# Altium PCB Spatial Breakout.PcbDoc
Units mm, origin at the board's own origin, x right, y up, seen from the top; angles counter-clockwise.
Board outline 18 x 16 mm, 2 copper layers (Top Layer, Bottom Layer); 14 components, 15 nets, 89 pads, 13 vias.
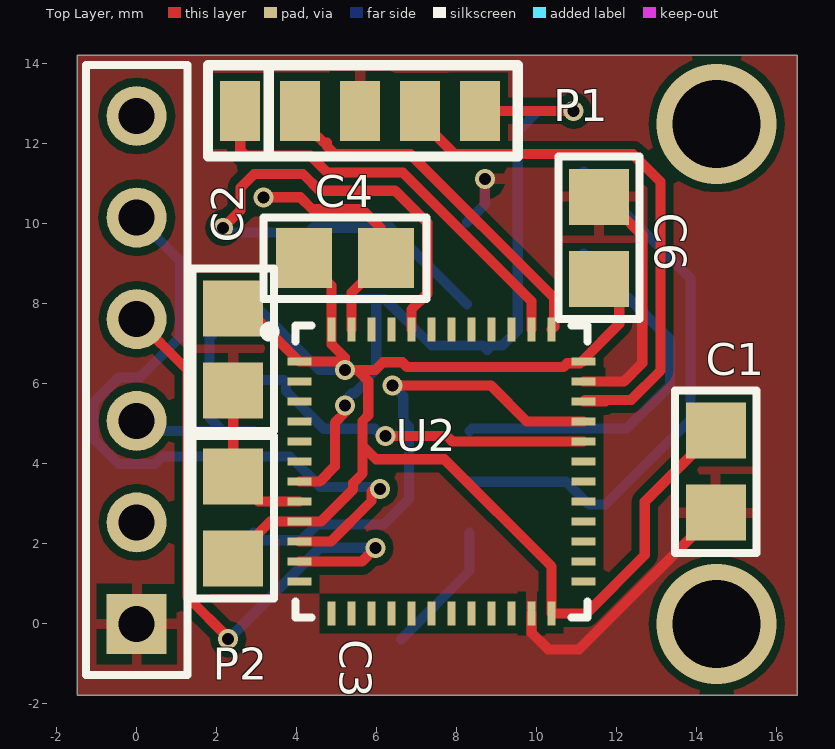
[diagram p0: Top Layer view]
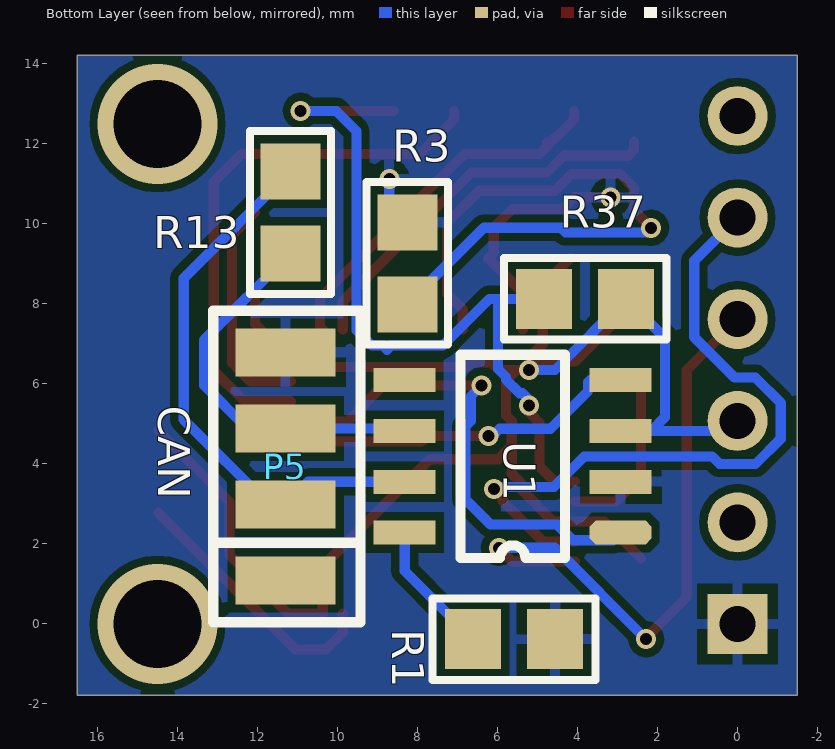
[diagram p1: Bottom Layer view, seen from below]

## Layer stack, top to bottom
Top Solder: solder mask 0.0102, Solder Resist, Dk 3.5
Top Layer: signal copper 0.0356
Dielectric 1: dielectric 0.32, FR-4, Dk 4.8
Bottom Layer: signal copper 0.0356
Bottom Solder: solder mask 0.0102, Solder Resist, Dk 3.5

## Board outline
-1.49,-1.778 -1.49,14.222 16.51,14.222 16.51,-1.778

## Design rules (kind name [scope] priority, off if disabled: settings)
Clearance [All] p1: gap=0.203
MinimumSolderMaskSliver [All] p1: minsoldermaskwidth=0.127
PolygonConnect [All] p1: connectstyle=Relief reliefconductorwidth=0.254 reliefentries=4 polygonreliefangle="90 Angle" airgapwidth=0.254
RoutingVias [All] p1: holewidth=0.711 width=1.27 viastyle="Through Hole" minholewidth=0.711 minwidth=1.27 maxholewidth=0.711 maxwidth=1.27
SolderMaskExpansion [All] p1: expansion=0.08
Width [All] p1: maxlimit=0.254 minlimit=0.254 preferedwidth=0.254
29 further rules are at their usual default settings.

## Components (designator, comment, footprint, x,y, rotation, side; value= is the part's Value field where it differs from the comment)
C1 "" R0805 14.478,3.81 r90 top
C2 "" R0805 2.413,6.858 r90 top
C3 "" R0805 2.413,2.667 r270 top
C4 "" R0805 5.207,9.144 r180 top
C6 "Cap" R0805 11.557,9.652 r90 top
P1 "ST-Link" "SMD 5Wire - Small" 5.588,12.827 r270 top
P2 "Header 6" HDR1X6 0,0 r90 top
P5 "CAN" "SMD 4Wire" 11.303,3.937 r180 bottom
R1 "Res1" R0805 5.588,-0.381 r180 bottom
R3 "10k" R0805 8.255,9.017 r270 bottom
R13 "Res1" R0805 11.176,10.287 r90 bottom
R37 "10k" R0805 3.81,8.128 r180 bottom
U1 "CAN TRANCEIVER" SOP8 2.921,2.286 r180 bottom
U2 "Dash" "STM32F072CBU6 - No Heatsink" 7.62,3.81 r0 top locked

## Footprints (in the part's own frame and the unit in brackets; to place one, negate y for a bottom-side part, rotate by r counter-clockwise, add the part's x,y. Pads: shape width x height; smd on the part's side, far side on the other; paste and mask are expansions set on the pad)
HDR1X6 [mm] "Connector; Header; 6 Position"
  rect 1.5x1.5 hole 0.9: 1(0,0)
  round 1.5 hole 0.9: 2(2.54,0) 3(5.08,0) 4(7.62,0) 5(10.16,0) 6(12.7,0)
  silkscreen extent -1.27,-1.27 13.97,1.27
R0805 [mm]
  rect 1.4x1.5 smd: 1(-1.025,0) 2(1.025,0)
  silkscreen extent -2.03,-1.02 2.03,1.02, body extent -1.4,-0.76 1.4,0.76, height 1
"SMD 4Wire" [mm]
  rect 2.5x1.2 smd: 1(0,-2.85) 2(0,-0.95) 3(0,0.95) 4(0,2.85)
  silkscreen extent -1.81,-3.89 1.88,3.89
"SMD 5Wire - Small" [mm]
  rect 1.5x1 smd: 1(0,-3) 2(0,-1.5) 3(0,0) 4(0,1.5) 5(0,3)
  silkscreen extent -1.14,-3.81 1.14,3.94
SOP8 [mm]
  oct 1.55x0.6 smd: 1(0,0)
  rect 1.55x0.6 smd: 2(0,1.27) 3(0,2.54) 4(0,3.81) 5(-5.4,3.81) 6(-5.4,2.54) 7(-5.4,1.27) 8(-5.4,0)
  silkscreen extent -4,-0.63 -1.4,4.45, body extent -4.62,-0.62 -0.62,4.38, height 1.75
"STM32F072CBU6 - No Heatsink" [mm] "STMicroelectronics STM32F072CBU6, 32bit ARM Cortex M0 Microcontroller, 48MHz, 64 kB, 128 kB Flash, 48-Pin UFQFPN"
  rect 0.6x0.2 smd: 1(-3.55,2.75) 2(-3.55,2.25) 3(-3.55,1.75) 4(-3.55,1.25) 5(-3.55,0.75) 6(-3.55,0.25) 7(-3.55,-0.25) 8(-3.55,-0.75) 9(-3.55,-1.25) 10(-3.55,-1.75) 11(-3.55,-2.25) 12(-3.55,-2.75) 25(3.55,-2.75) 26(3.55,-2.25) 27(3.55,-1.75) 28(3.55,-1.25) 29(3.55,-0.75) 30(3.55,-0.25) 31(3.55,0.25) 32(3.55,0.75) 33(3.55,1.25) 34(3.55,1.75) 35(3.55,2.25) 36(3.55,2.75)
  rect 0.2x0.6 smd: 13(-2.75,-3.55) 14(-2.25,-3.55) 15(-1.75,-3.55) 16(-1.25,-3.55) 17(-0.75,-3.55) 18(-0.25,-3.55) 19(0.25,-3.55) 20(0.75,-3.55) 21(1.25,-3.55) 22(1.75,-3.55) 23(2.25,-3.55) 24(2.75,-3.55) 37(2.75,3.55) 38(2.25,3.55) 39(1.75,3.55) 40(1.25,3.55) 41(0.75,3.55) 42(0.25,3.55) 43(-0.25,3.55) 44(-0.75,3.55) 45(-1.25,3.55) 46(-1.75,3.55) 47(-2.25,3.55) 48(-2.75,3.55)
  silkscreen extent -4.42,-3.65 3.65,3.65, body extent -3.5,-3.5 3.5,3.5, height 0.55

## Part data
C1 C2 C3 C4: library part "Cap Semi", "Capacitor (Semiconductor SIM Model)"
C6: "Capacitor"
P1: library part "Header 5", "Header, 5-Pin"
P2: "Header, 6-Pin"
P5: library part "Header 2X2H", "Header, 2-Pin, Dual row, Right Angle"
R1 R13: "Resistor"
R3 R37: library part Res2, "Resistor"
U1: library part 595-SN65HVD233
U2: library part STM32F072CBU6, "PDM Mk21 MICRO"

## Via types
v1: diameter 0.5, hole 0.3, Top Layer to Bottom Layer, 11 vias
v2: diameter 3, hole 2.2, Top Layer to Bottom Layer, 2 vias

## Nets (pads, with @x,y where several pads share a name; then routed paths per layer and width w, separated by ;. In a path a pad name is that pad's centre, name@x,y a point inside that pad or via, vN(x,y) a via of type N, cw(c..) or ccw(c..) an arc to the next point about the centre after c; other vN are vias at no path point)
3.3V: C1.2 C2.2 C3.2 C4.2 C6.1 P2.3 R37.2 U1.3 U2.1 U2.9 U2.24 U2.36 U2.48 | length 45.9
  Top Layer w0.254: C3.2 3.331,2.56 U2.9 4.604,2.56 5.41,3.367 5.41,3.527 5.643,3.759 5.643,4.459 ; C2.2 2.747,7.883 U2.1 4.997,6.56 v1(5.207,6.35) ; C4.2 4.87,8.456 U2.48 4.87,6.993 5.207,6.656 v1(5.207,6.35) ; U2.36 U2.36@11.119,6.56 ; C6.1@12.065,8.373 12.065,7.506 U2.36@11.119,6.56 ; C1.2 12.7,3.057 12.7,1.723 11.237,0.26 U2.24 10.37,1.441 7.692,4.119 5.983,4.119 5.643,4.459 ; v1(5.207,6.35) 5.513,6.35 ; 5.513,6.35 5.787,6.076 5.787,5.221 5.643,5.076 5.643,4.459 ; 5.513,6.35 5.963,6.35 6.158,6.545 6.639,6.545 6.762,6.422 10.665,6.422 10.76,6.517 11.076,6.517 U2.36@11.119,6.56
  Bottom Layer w0.254: P2.3 0.254,4.826 U1.3@2.159,4.826 ; U1.3 U1.3@2.159,4.826 ; v1(5.207,6.35) 4.563,6.35 R37.2 1.816,7.159 1.816,5.169 U1.3@2.159,4.826
14V: P5.1
BOOT: R3.2 U2.44 | length 16.3
  Top Layer w0.254: v1(2.159,9.906) 2.595,10.342 2.595,10.908 2.935,11.248 4.157,11.248 4.572,10.832 6.461,10.832 7.262,10.031 7.262,8.257 6.87,7.865 U2.44
  Bottom Layer w0.254: v1(2.159,9.906) 2.274,9.791 4.3,9.791 4.415,9.906 6.341,9.906 R3.2
CAN1_H: P5.2 R13.2 U1.7 | length 13.9
  Bottom Layer w0.254: U1.7 10.734,3.556 P5.2 11.72,2.987 13.843,5.11 13.843,8.645 R13.2
CAN1_L: P5.3 R13.1 U1.6 | length 9.7
  Bottom Layer w0.254: U1.6 8.382,4.887 P5.3 12.253,4.887 13.335,5.969 13.335,7.103 R13.1
CANRX: U1.4 U2.32 | length 9
  Top Layer w0.254: v1(6.223,4.699) 7.759,4.699 7.898,4.56 U2.32
  Bottom Layer w0.254: U1.4 3.683,6.096 3.734,6.045 3.734,5.823 4.676,4.881 5.951,4.881 6.132,4.699 v1(6.223,4.699)
CANTX: U1.1 U2.33 | length 12.5
  Top Layer w0.254: v1(6.399,5.965) 8.854,5.965 9.759,5.06 U2.33
  Bottom Layer w0.254: U1.1 3.111,2.095 4.116,2.095 4.506,2.485 6.168,2.485 6.803,3.12 6.803,4.939 6.663,5.08 6.663,5.701 v1(6.399,5.965)
GND: C1.1 C2.1 C3.1 C4.1 C6.2 P1.3 P2.1 P5.4 R1.2 R3.1 U1.2 U2.8 U2.23 U2.35 U2.47 | length 23.9
  Top Layer w0.254: C2.1 C3.1 3.045,3.06 U2.8 ; v1(3.175,10.668) 4.09,10.668 4.383,10.375 5.627,10.375 6.096,9.906 6.096,9.28 C4.1 5.37,8.282 U2.47 ; U2.23 9.87,-0.218 10.287,-0.635 11.058,-0.635 C1.1 ; U2.35 12.173,6.06 12.637,6.524 12.637,9.718 12.068,10.287 C6.2@12.065,10.287
  Bottom Layer w0.254: R3.1 8.707,10.494 v1(8.707,11.123)
NetR1_1: R1.1 U1.8 | length 3.4
  Bottom Layer w0.254: R1.1 8.321,1.327 U1.8
NRST: P1.5 R37.1 U2.7 | length 20
  Top Layer w0.254: U2.7 4.572,3.56 4.953,3.941 4.953,5.033 5.207,5.287 v1(5.207,5.461) ; P1.5 v1(10.922,12.827)
  Bottom Layer w0.254: R37.1 5.969,8.128 ; v1(5.207,5.461) 5.207,5.594 5.383,5.77 5.447,5.77 5.787,6.11 5.787,6.174 5.988,6.375 5.988,8.109 5.969,8.128 ; v1(10.922,12.827) 10.033,12.827 9.525,12.319 9.525,7.345 9.142,6.962 8.867,6.962 8.763,6.858 8.659,6.962 7.368,6.962 6.202,8.128 5.969,8.128
SWCLK: P1.2 U2.37 | length 9.3
  Top Layer w0.254: P1.2 4.088,12.61 4.535,12.163 4.556,12.163 4.679,12.04 4.758,12.04 4.758,11.94 4.951,11.747 6.839,11.747 10.438,8.148 10.438,7.428 U2.37
SWDIO: P1.4 U2.34 | length 14.4
  Top Layer w0.254: P1.4 7.088,12.61 7.951,11.747 12.404,11.747 13.094,11.057 13.094,6.335 12.362,5.603 11.213,5.603 U2.34 11.712,5.56
SWO: P1.1 U2.38 | length 9.8
  Top Layer w0.254: 2.588,12.065 2.588,11.848 2.731,11.705 4.346,11.705 4.762,11.29 6.65,11.29 9.87,8.07 U2.38
UART_RX: P2.4 U2.11 | length 15.6
  Top Layer w0.254: P2.4 1.27,6.35 1.27,0.675 2.286,-0.341 v1(2.286,-0.381) ; U2.11 5.624,1.56 v1(5.969,1.905)
  Bottom Layer w0.254: v1(2.286,-0.381) 4.572,1.905 v1(5.969,1.905)
UART_TX: P2.5 U2.10 | length 17.7
  Top Layer w0.254: U2.10 4.854,2.06 5.867,3.073 5.867,3.315 5.931,3.378 v1(6.082,3.378)
  Bottom Layer w0.254: P2.5 1.08,9.08 1.08,7.173 0.068,6.16 -0.447,6.16 -1.08,5.527 -1.08,4.633 -0.447,4 0.447,4 0.634,4.186 3.833,4.186 4.59,3.429 6.031,3.429 v1(6.082,3.378)
pads on no net: P2.2 P2.6 U1.5 U2.2 U2.3 U2.4 U2.5 U2.6 U2.12 U2.13 U2.14 U2.15 U2.16 U2.17 U2.18 U2.19 U2.20 U2.21 U2.22 U2.25 U2.26 U2.27 U2.28 U2.29 U2.30 U2.31 U2.39 U2.40 U2.41 U2.42 U2.43 U2.45 U2.46
copper on no net:
  other v2: 14.5,0 14.5,12.5

## Polygon pours and split planes (outlines as drawn)
GND on Top Layer "GND - TOP" (solid, remove dead copper, pour order 2): -1.49,-1.778 -1.49,14.222 16.51,14.222 16.51,-1.778
GND on Bottom Layer "GND - BOTTOM" (solid, remove dead copper, pour order 1): -1.49,-1.778 -1.49,14.222 16.51,14.222 16.51,-1.778

## Silkscreen, mask and mechanical layers (free items; w line width, h text height)
Mechanical 1:
  the board outline again, w0.254